# Altium PCB 120W_Syn_Buck_PCB.PcbDoc
Units mm, origin at the board's own origin, x right, y up, seen from the top; angles counter-clockwise.
Board outline 120 x 80 mm, 2 copper layers (Top Layer, Bottom Layer); 58 components, 33 nets, 193 pads, 15 vias.
Unrouted connection lines stored in the file: 73.
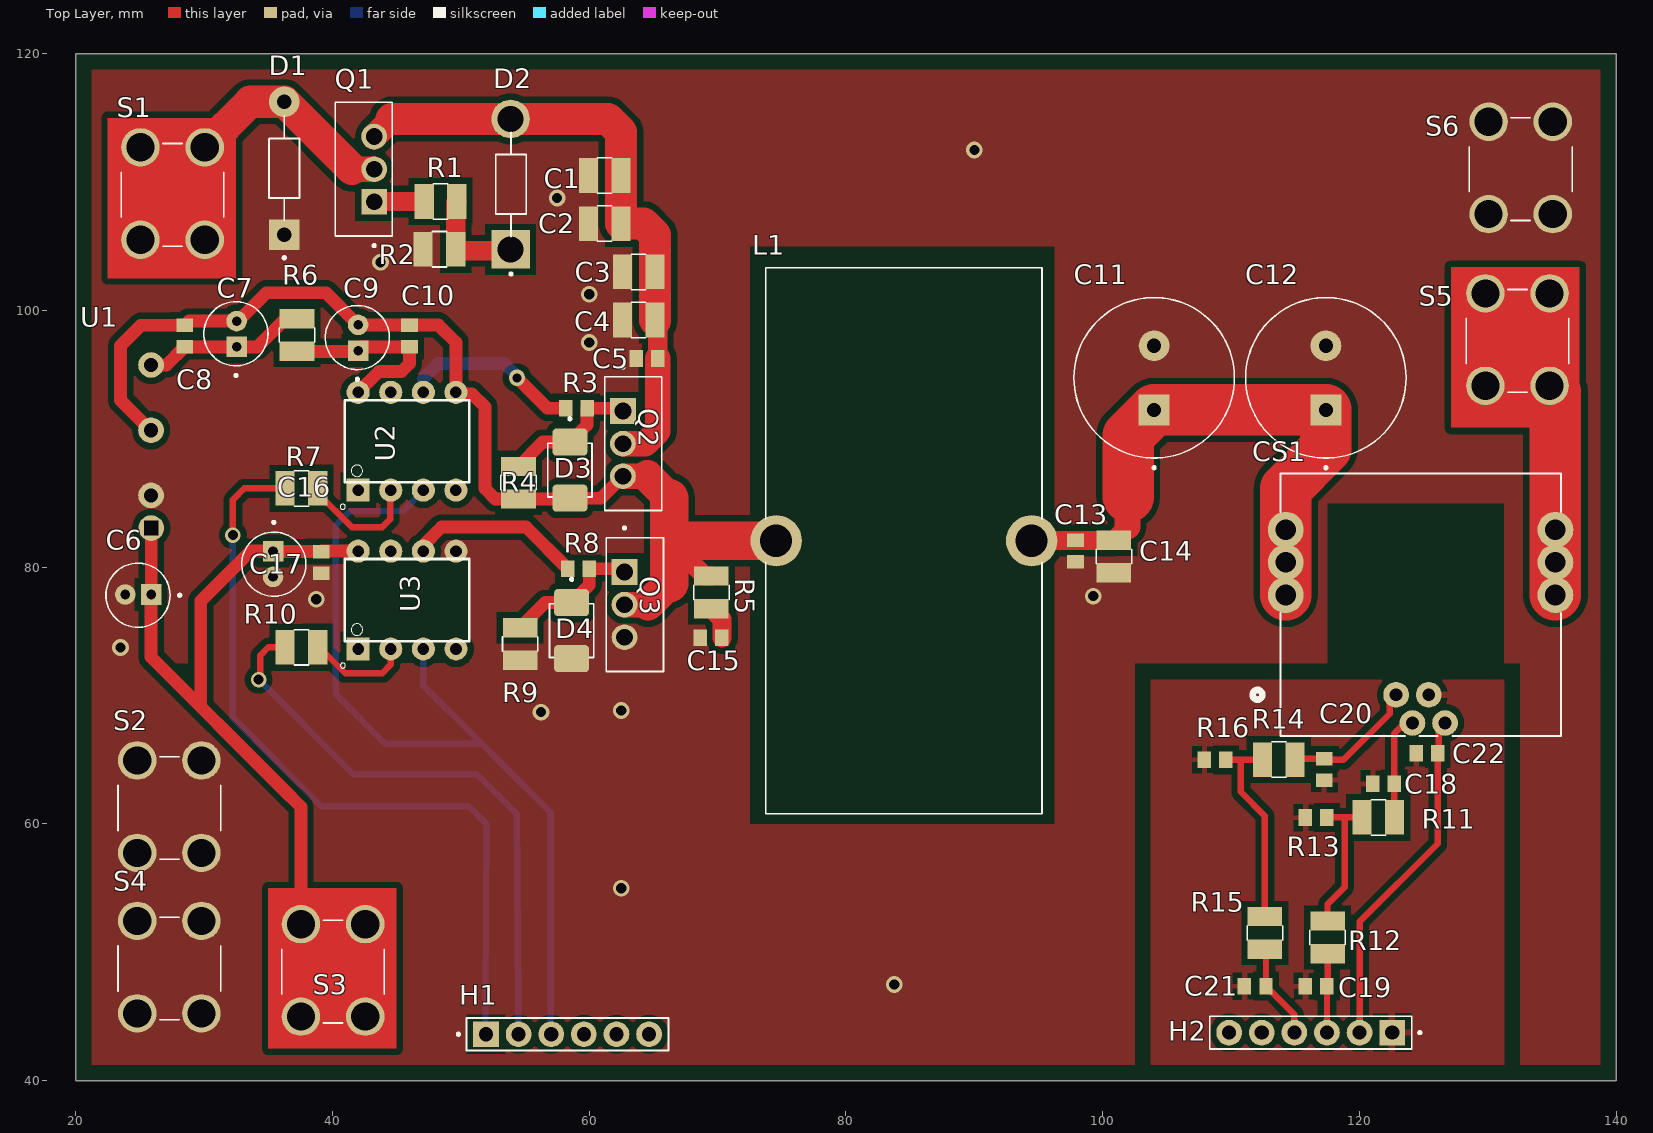
[diagram p0: Top Layer view]
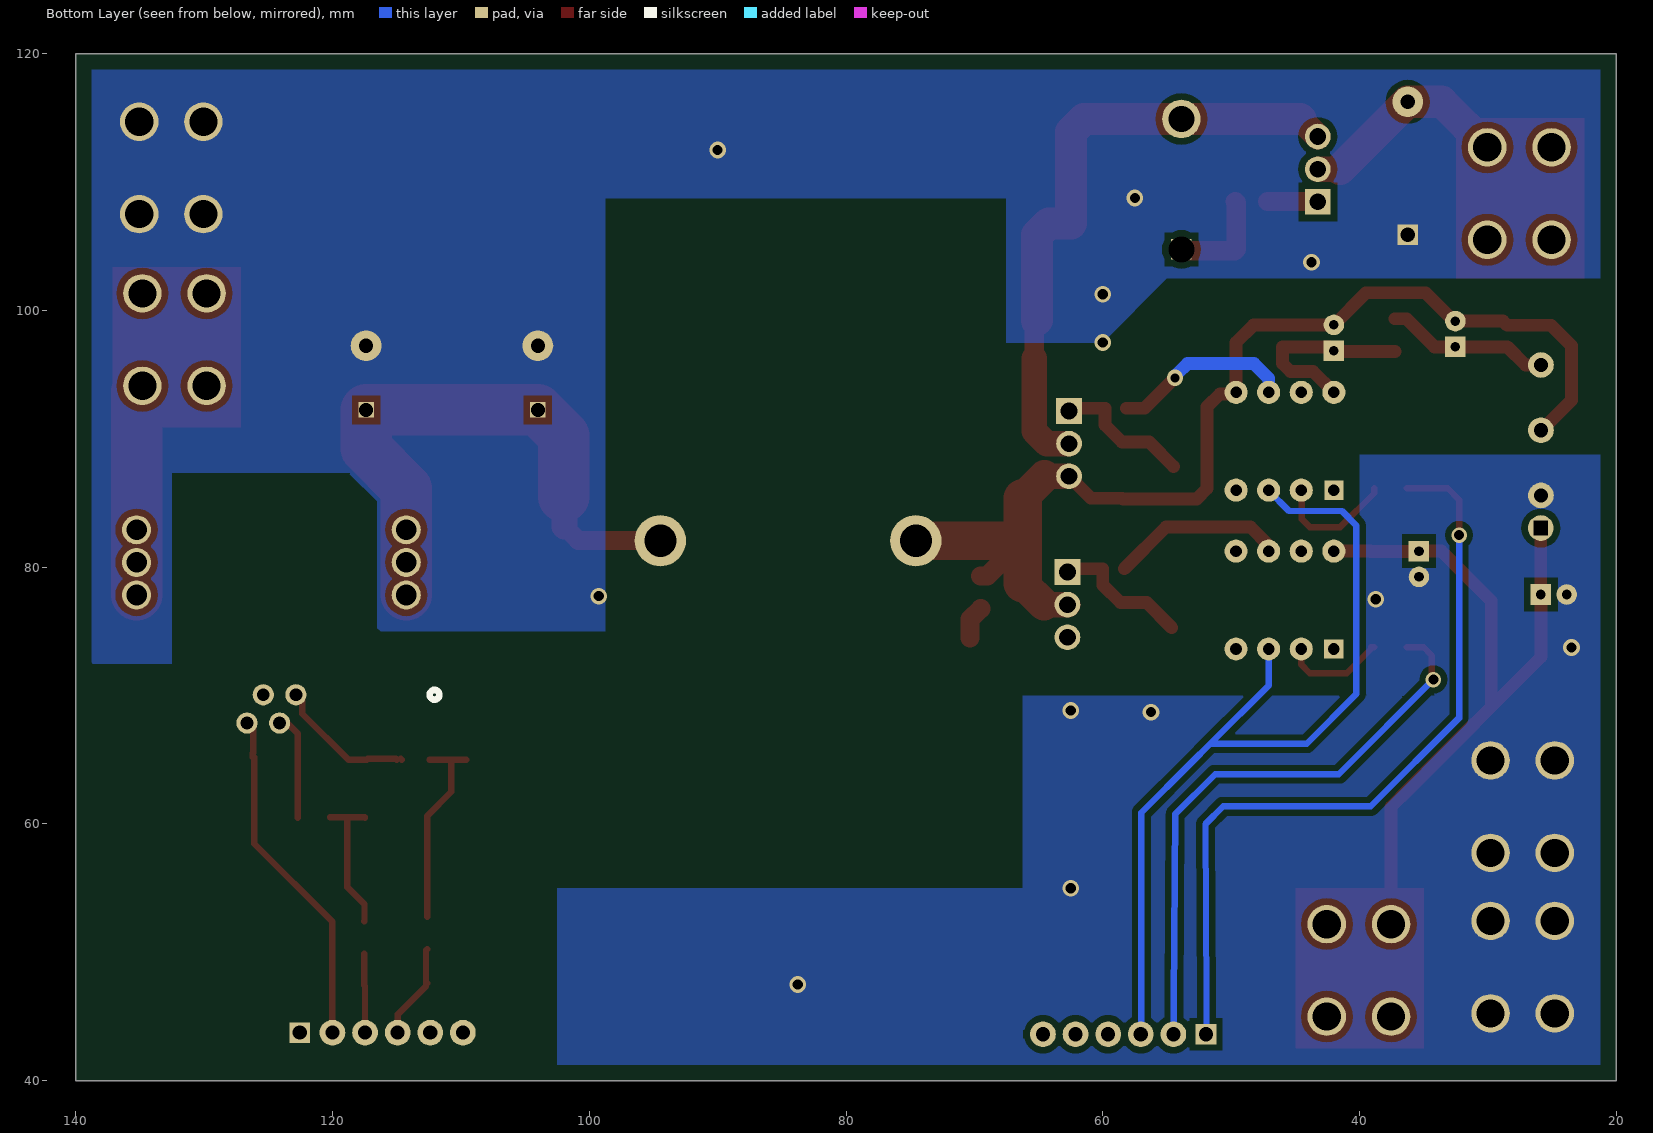
[diagram p1: Bottom Layer view, seen from below]

## Layer stack, top to bottom
Top Solder: solder mask 0.0102, Solder Resist, Dk 3.5
Top Layer: signal copper 0.0356
Dielectric 1: dielectric 0.32, FR-4, Dk 4.8
Bottom Layer: signal copper 0.0356
Bottom Solder: solder mask 0.0102, Solder Resist, Dk 3.5

## Board outline
20,40 140,40 140,120 20,120

## Design rules (kind name [scope] priority, off if disabled: settings)
Clearance Clearance_1 [All] p1: gap=0.5 ignorepadtopadclearanceinfootprint=FALSE
Clearance Clearance_2 [InNet('SGND')] p2: gap=1 ignorepadtopadclearanceinfootprint=FALSE
PlaneClearance [All] p1: clearance=0.5
PolygonConnect PolygonConnect_SGND [InNet('SGND')] p1: thpad.connectstyle=Relief thpad.reliefconductorwidth=0.5 thpad.reliefentries=4 thpad.polygonreliefangle="90 Angle" thpad.airgapwidth=0.5 smdpad.connectstyle=Relief smdpad.reliefconductorwidth=0.4 smdpad.reliefentries=4 smdpad.polygonreliefangle="90 Angle" smdpad.airgapwidth=0.4 via.connectstyle=Relief via.reliefconductorwidth=0.4 via.reliefentries=4 via.polygonreliefangle="90 Angle" via.airgapwidth=0.4
PolygonConnect PolygonConnect_PGND [InNet('PGND')] p2: connectstyle=Direct reliefconductorwidth=0.254 reliefentries=4 polygonreliefangle="90 Angle" airgapwidth=0.254
RoomDefinition 120W_Syn_Buck_Schematic [InComponentClass('120W_Syn_Buck_Schematic')] p1: confinementstyle=ConfineIn formatcopy=TRUE lockcomponents=FALSE outline 178.993,26.924 614.603,26.924 614.603,72.898 178.993,72.898
RoutingVias [InNet('No Net')] p1: holewidth=0.8 width=1.8 viastyle="Through Hole" minholewidth=0.8 minwidth=1.8 maxholewidth=0.8 maxwidth=1.8
SolderMaskExpansion [All] p1: expansion=0.102 istentingtop=FALSE
Width Width_1 [InNet('No Net')] p1: maxlimit=6 minlimit=0.4 preferedwidth=3 minimp=50.000000 maximp=50.000000 favimp=50.000000
29 further rules are at their usual default settings.

## Classes and differential pairs
component class 120W_Syn_Buck_Schematic: C1 C2 C3 C4 C5 C8 C10 C11 C12 C13 C14 C15 C17 C18 C19 C20 C21 C22 CS1 D1 D2 D3 D4 H2 L1 Q1 Q2 Q3 R1 R2 R3 R4 R5 R6 R7 R8 R9 R10 R11 R12 R13 R14 R15 R16 S2 S3 S4 S5 S6 U1 U2 U3

## Components (designator, comment, footprint, x,y, rotation, side; value= is the part's Value field where it differs from the comment)
C1 "1uF" 1210 61.25,110.625 r0 top
C2 "1uF" 1210 61.25,106.875 r0 top
C3 "1uF" 1210 63.897,103.112 r0 top
C4 "1uF" 1210 63.897,99.362 r0 top
C5 "100nF" 0805 64.625,96.25 r0 top
C6 "2.2uF" CAP_ELECTROLYTIC_2MM_5X11MM 28.237,77.697 r180 top
C7 "2.2uF" CAP_ELECTROLYTIC_2MM_5X11MM 32.361,94.802 r90 top
C8 "100nF" 0805 28.5,97.875 r270 top
C9 "22uF" CAP_ELECTROLYTIC_2MM_5X11MM 41.822,94.506 r90 top
C10 "100nF" 0805 46,97.875 r270 top
C11 "470uF" CAP_ELECTROLYTIC_5MM_12.5X25MM 103.473,84.251 r90 top
C12 "470uF" CAP_ELECTROLYTIC_5MM_12.5X25MM 116.848,84.251 r90 top
C13 "100nF" 0805 97.875,81.375 r90 top
C14 "1uF" 1210 100.75,80.875 r90 top
C15 "1nF" 0805 69.625,74.5 r0 top
C16 "22uF" CAP_ELECTROLYTIC_2MM_5X11MM 35.553,83.619 r270 top
C17 "100nF" 0805 39.125,80.5 r90 top
C18 "4.7nF" 0805 122,63.125 r0 top
C19 "1nF" 0805 116.75,47.375 r0 top
C20 "47nF" 0805 117.25,64.375 r90 top
C21 "1nF" 0805 112,47.375 r0 top
C22 "47nF" 0805 125.375,65.5 r0 top
CS1 "Current Sensor" HLSR-10P 111.034,84.543 r0 top (schematic designator S1)
D1 "TVS 58V" TVS_DIODE_DO-15 34.523,106.098 r90 top
D2 "12V ZENER" ZENER_DIODE_DO-201 50.065,100.686 r90 top
D3 "15V ZENER" DO214AA_DIODE 56.9,89.871 r90 top
D4 "15V ZENER" DO214AA_DIODE 57.025,77.371 r90 top
H1 "6 Pin Header" 6_PINS_HEADER_FEMALE 49.674,43.498 r0 top
H2 "6 Pin Header" 6_PINS_HEADER_FEMALE 124.826,43.877 r180 top
L1 "180uH" ATCA-08-251M-V 60.637,104.415 r0 top
Q1 "IRF5210PBF" IRF5210PBF_TO-220 43.202,105.031 r90 top
Q2 "IRF3710PBF" IRF3710PBF_TO-220 62.546,95.848 r270 top
Q3 "IRF3710PBF" IRF3710PBF_TO-220 62.671,83.308 r270 top
R1 "100 ohms" 1210 48.375,108.375 r180 top
R2 "100k ohms" 1210 48.375,104.875 r0 top
R3 "10 ohms" 0805 59.125,92.375 r0 top
R4 "10k ohms" 1210 54.375,86.625 r90 top
R5 "4.7 ohms" 1210 69.625,78 r270 top
R6 "1 ohms" 1210 37.125,98.125 r90 top
R7 "200 ohms" 1210 37.625,86.25 r0 top
R8 "10 ohms" 0805 59.289,79.875 r0 top
R9 "10k ohms" 1210 54.513,74.062 r90 top
R10 "200 ohms" 1210 37.625,73.875 r0 top
R11 "10k ohms" 1210 121.5,60.625 r0 top
R12 "200 ohms" 1210 117.625,51.125 r270 top
R13 "20k ohms" 0805 116.75,60.5 r0 top
R14 "10k ohms" 1210 113.75,65.125 r0 top
R15 "200 ohms" 1210 112.737,51.478 r270 top
R16 "20k ohms" 0805 108.875,65 r0 top
S1 "Screw Terminal" SCREW_TERMINAL_5x7.2MM_2MM 27.5,109 r0 top
S2 "Screw Terminal" SCREW_TERMINAL_5x7.2MM_2MM 27.25,61.25 r0 top
S3 "Screw Terminal" SCREW_TERMINAL_5x7.2MM_2MM 40,48.5 r0 top
S4 "Screw Terminal" SCREW_TERMINAL_5x7.2MM_2MM 27.25,48.75 r0 top
S5 "Screw Terminal" SCREW_TERMINAL_5x7.2MM_2MM 132.25,97.625 r0 top
S6 "Screw Terminal" SCREW_TERMINAL_5x7.2MM_2MM 132.5,111 r0 top
U1 "B1212S-2WR3L" B1212S-2WR3L_SIP-4 25.24,83.05 r90 top
U2 "TLP250H" TLP250H_DIP-8 41.746,84.349 r90 top
U3 "TLP250H" TLP250H_DIP-8 41.751,71.979 r90 top

## Footprints (in the part's own frame and the unit in brackets; to place one, negate y for a bottom-side part, rotate by r counter-clockwise, add the part's x,y. Pads: shape width x height; smd on the part's side, far side on the other; paste and mask are expansions set on the pad)
6_PINS_HEADER_FEMALE [mm]
  rect 2x2 / inner round 1.605 / far side rect 1.605x1.605 hole 1.1: 1(2.286,0.127)
  rect 1.605x1.605 / inner round 1.605 / far side rect 1.605x1.605 hole 1.07: 1(2.286,0.127)
  round 2 hole 1.1: 2(4.826,0.127) 3(7.366,0.127) 4(9.906,0.127) 5(12.446,0.127) 6(14.986,0.127)
  round 1.605 hole 1.07: 2(4.826,0.127) 3(7.366,0.127) 4(9.906,0.127) 5(12.446,0.127) 6(14.986,0.127)
  silkscreen extent 0.04,-1.14 16.51,1.4, body extent 0.76,-1.14 16.51,1.4, height 8.51
0805 [mm]
  rect 1.05x1.3 smd: 1(-0.965,0) 2(0.711,0)
  body extent -1.13,-0.63 0.88,0.63, height 0.94
1210 [mm]
  rect 1.5x2.7 smd: 1(-1.312,-0.112) 2(1.228,-0.112)
  silkscreen extent -0.6,-1.49 0.52,1.27, body extent -1.64,-1.36 1.56,1.14, height 1.5
ATCA-08-251M-V [mm]
  round 4 hole 2.5: 1(13.926,-22.352) 2(33.826,-22.352)
  silkscreen extent 13.13,-43.6 34.63,-1.1, body extent 13.04,-43.8 34.54,-0.9, height 46.85
B1212S-2WR3L_SIP-4 [mm]
  round 2 hole 1.1 square mask+0.102: 1(0,-0.644)
  round 2 hole 1.1 mask+0.102: 2(2.54,-0.635) 4(7.62,-0.635) 6(12.7,-0.635)
  body extent -1.5,-2 17.93,4.98, height 14.1
CAP_ELECTROLYTIC_2MM_5X11MM [mm]
  rect 1.6x1.6 hole 0.75: 1(2.362,-0.178)
  round 1.6 hole 0.75: 2(4.369,-0.178)
  silkscreen extent 0.03,-2.62 5.88,2.38, body extent 0.88,-2.62 5.88,2.38, height 11
CAP_ELECTROLYTIC_5MM_12.5X25MM [mm]
  rect 2.4x2.4 / inner round 1.2 / far side rect 1.2x1.2 hole 1.1: 1(7.999,-0.527)
  round 2.4 hole 1.1: 2(12.999,-0.527)
  silkscreen extent 3.4,-6.78 16.75,5.72, body extent 4.25,-6.77 16.75,5.72, height 25
DO214AA_DIODE [mm]
  rrect25% 2.1x2.7 smd paste+0: 1(-4.496,-1.6)
  rrect25% 2.1x2.7 smd: 2(-0.126,-1.6)
  silkscreen extent -4.41,-3.32 1.79,0.11, body extent -5.03,-3.38 0.41,0.18, height 2.46
HLSR-10P [mm]
  round 2 / inner round 1.524 / far side round 1.651 hole 1 paste-0.826 mask+0: 1(11.811,-14.478) 2(13.081,-16.678) 3(14.351,-14.478) 4(15.621,-16.678)
  round 2.8 / inner round 1.524 / far side round 2.261 hole 1.6 paste-1.13 mask-1.13: 5(24.216,-6.708) 6(24.216,-4.168) 7(24.216,-1.628) 8(3.216,-1.628) 9(3.216,-4.168) 10(3.216,-6.708)
  silkscreen extent 0.64,-17.69 24.64,2.76, body extent 2.29,-17.78 25.15,0.76, height 12
IRF3710PBF_TO-220 [mm]
  rect 2x2 hole 1.3: 1(3.683,0.079)
  round 2 hole 1.3: 2(6.223,0.079) 3(8.763,0.079)
  silkscreen extent 0.17,-1.33 11.43,3.11, body extent 1.02,-1.4 11.43,3.05, height 19.3
IRF5210PBF_TO-220 [mm]
  rect 2x2 hole 1.3: 1(3.429,-0.048)
  round 2 hole 1.3: 2(5.969,-0.048) 3(8.509,-0.048)
  silkscreen extent -0.09,-1.46 11.18,2.98, body extent 0.76,-1.52 11.18,2.92, height 19.3
SCREW_TERMINAL_5x7.2MM_2MM [mm]
  round 3 hole 2.2: 1(-2.45,-3.5) 1(-2.45,3.7) 1(2.55,-3.5) 1(2.55,3.7)
  silkscreen extent -3.95,-4 4.05,4, body extent -4.55,-3.51 4.59,4.36, height 17.34
TLP250H_DIP-8 [mm]
  rect 1.5x1.5 / inner round 1.5 / far side rect 1.5x1.5 hole 0.9: 1(1.651,-0.254)
  rect 1.8x1.8 / inner round 1.5 / far side rect 1.5x1.5 hole 0.9: 1(1.651,-0.254)
  round 1.5 hole 0.9: 2(1.651,-2.794) 3(1.651,-5.334) 4(1.651,-7.874) 5(9.271,-7.874) 6(9.271,-5.334) 7(9.271,-2.794) 8(9.271,-0.254)
  round 1.8 hole 0.9: 2(1.651,-2.794) 3(1.651,-5.334) 4(1.651,-7.874) 5(9.271,-7.874) 6(9.271,-5.334) 7(9.271,-2.794) 8(9.271,-0.254)
  silkscreen extent 0.16,-8.91 8.66,1.14, body extent 1.44,-9.15 9.48,1.03, height 4.51
TVS_DIODE_DO-15 [mm]
  rect 2.4x2.4 / inner round 1.59 / far side rect 1.59x1.59 hole 1.1 mask+0.102: 1(-0.208,-1.727)
  rect 1.59x1.59 / inner round 1.59 / far side rect 1.59x1.59 hole 1.06 mask+0.102: 1(-0.202,-1.739)
  round 2.4 hole 1.1 mask+0.102: 2(10.152,-1.727)
  round 1.59 hole 1.06 mask+0.102: 2(10.158,-1.739)
  silkscreen extent -2.1,-2.93 9.04,-0.54, body extent -0.73,-3.09 10.41,-0.37, height 2.72
ZENER_DIODE_DO-201 [mm]
  rect 1.59x1.59 / inner round 1.59 / far side rect 1.59x1.59 hole 1.06 mask+0.102: 1(4.064,-3.81)
  rect 3x3 / inner round 1.59 / far side rect 1.59x1.59 hole 2 mask+0.102: 1(4.064,-3.81)
  round 1.59 hole 1.06 mask+0.102: 2(14.224,-3.81)
  round 3 hole 2 mask+0.102: 2(14.224,-3.81)
  silkscreen extent 2.06,-5.03 13.2,-2.66, body extent 3.54,-5.23 14.68,-2.51, height 2.72

## Part data
C1 C2 C3 C4 C14: library part HMK325B7105KN-T, "1uF  MLCC (3225) 1210 1uF 100V 10% X7R"
C5 C8 C10 C13 C17: library part AC0805KKX7R0BB104, "100nF  MLCC (2012) 0805 100nF 100VDC ±10% X7R AUTOMOTIVE"
C6 C7: library part PKRI-050V2R2MC110-T/A5.0, "2.2uF Electrolytic Capacitor"
C9 C16: library part PKRM-050V220MC110-T/A5.0, "22uF Electrolytic Capacitor"
C11 C12: library part EEUFC1H471, "470uF Electrolytic Capacitor"
C15: library part CL21B102KC6WPNC, "1nF Snubber  MLCC (2012) 0805 1nF 100VDC ±10% X7R AUTOMOTIVE"
C18: library part CL21C472JBFNNNE, "4.7nF MLCC (2012) 0805 4.7nF 50VDC ±5%  0G (NP0)"
C19 C21: library part CC0805JRNPO9BN1021, "1nF  MLCC (2012) 0805 1nF 50VDC ±5% C0G (NP0)"
C20 C22: library part CC0805JRX7R9BB473, "47nF MLCC (2012) 0805 47nF 50VDC ±5% X7R"
CS1: library part HLSR-10P, "10A Hall effect, open loop, +-20A, isolated"
D1: library part P6KE68A-TKS, "TVS Diode 58.1V 600W"
D2: library part 1N5349B, "12V Zener Diode 5W"
D3 D4: library part 1SMB5929BT3G, "15V ZENER DIODE 3W"
H1: library part DS1023-1X6S21
H2: library part DS1023-1X6S21, "6x1 FEMALE HEADER"
L1: library part INDUCTOR_LAB-MADE, "180uH Inductor 8A"
Q1: "P-Channel Power MOSFET, TO-220AB, -100V, -40A,"
Q2 Q3: "N-Channel Power MOSFET, TO-220AB, 100V, 57A"
R1: library part "Resistor 100 ohms"
R2: library part "Resistor 100k ohms"
R3 R8: library part "Resistor 10 ohms"
R4 R9 R11 R14: library part "Resistor 10k ohms"
R5: library part "Resistor 4.7 ohms"
R6: library part "Resistor 1 ohm"
R7 R10 R12 R15: library part "Resistor 200 ohms"
R13 R16: library part "Resistor 20k ohms"
S1 S2 S3 S4 S5 S6: library part K14-00AH, "1 Pin Screw Terminal"
U1: "12V-12V isolated DC-DC, 2W, Hi-Link, SIP-6, Pins 3,5 NC"
U2 U3: "LED Optocoupler, VCC-GND 100nF bypass"

## Via types
v1: diameter 1.3, hole 0.8, Top Layer to Bottom Layer, 12 vias
v2: diameter 1.2, hole 0.8, Top Layer to Bottom Layer, 2 vias
v3: diameter 1.27, hole 0.711, Top Layer to Bottom Layer, 1 vias

## Nets (pads, with @x,y where several pads share a name; then routed paths per layer and width w, separated by ;. In a path a pad name is that pad's centre, name@x,y a point inside that pad or via, vN(x,y) a via of type N, cw(c..) or ccw(c..) an arc to the next point about the centre after c; other vN are vias at no path point)
5V_SENSOR: C22.2 CS1.4 H2.2
12V_ISO: C7.1 C8.2 R6.2 U1.6
12V_RAW: C6.1 C16.1 C17.2 S3.1 U1.1 U3.8
48V_PROT: C1.2 C2.2 C3.2 C4.2 C5.2 D2.2 Q1.3 Q2.2
48V_RAW: D1.2 Q1.2 S1.1
EN/DIS_GPIO: H1.4
FAULT: H1.5
HLSR_Vout: H2.3 R12.2
HLSR_Vout_PIN: C18.2 CS1.2 R11.2
HLSR_Vref: C21.2 H2.4 R15.2
HLSR_Vref_PIN: C20.2 CS1.1 R14.2
HS_GND: C7.2 C8.1 C9.2 C10.1 D3.1 L1.1 Q2.3 Q3.2 R4.1 R5.1 U1.4 U2.5
HS_MOSFET_IN: R3.1 U2.6
LS_MOSFET_IN: R8.1 U3.6
NetC9_1: C9.1 C10.2 R6.1 U2.8
NetC15_2: C15.2 R5.2
NetD2_1: D2.1 R1.1 R2.2
NetD3_2: D3.2 Q2.1 R3.2 R4.2
NetD4_2: D4.2 Q3.1 R8.2 R9.2
NetQ1_1: Q1.1 R1.2
NetR7_2: R7.2 U2.2
NetR10_2: R10.2 U3.2
NetR11_1: R11.1 R12.1 R13.2
NetR14_1: R14.1 R15.1 R16.2
PGND: C1.1 C2.1 C3.1 C4.1 C5.1 C6.2 C11.2 C12.2 C13.1 C14.1 C15.1 C16.2 C17.1 D1.1 D4.1 Q3.3 R2.1 R9.1 S2.1 S4.1 S6.1 U1.2 U3.5
  other v1: 83.75,47.5 62.5,55 56.25,68.715 62.5,68.84 23.5,73.75 38.75,77.5 99.25,77.75 60,97.5 60,101.25 43.75,103.75 57.5,108.75 90,112.5
SGND: C18.1 C19.1 C20.1 C21.1 C22.1 CS1.3 H1.3 H2.1 R13.1 R16.1 U2.3 U3.3 | length 31.4
  Bottom Layer w0.5: 44.125,66.25 51.625,66.25 53.122,64.752 57,60.875 ; H1.3@57,43.665 57,46.25 57,60
SPARE_ADC_1: H2.5
SPARE_ADC_2: H2.6
SPARE_CONTROL: H1.6
STM32_HS: H1.1 R7.1 | length 15.7
  Bottom Layer w0.5: 50.625,61.375 52,60 51.92,46.25
STM32_LS: H1.2 R10.1 | length 21.5
  Bottom Layer w0.5: 51.246,63.875 54.37,60.751 54.46,46.25 H1.2@54.46,43.665
Vout_OUT: CS1.5 CS1.6 CS1.7 S5.1
Vout_SENSOR_IN: C11.1 C12.1 C13.2 C14.2 CS1.8 CS1.9 CS1.10 L1.2
pads on no net: C19.2 U2.1 U2.4 U2.7 U3.1 U3.4 U3.7
copper on no net: | length 579.2
  Top Layer w0.5: v2(32.25,82.5) 32.25,85.25 33.138,86.138 36.313,86.138 ; v2(34.25,71.25) 34.375,71.375 34.375,73.125 35.013,73.763 36.313,73.763 ; 38.853,73.763 39.112,73.763 ; 38.853,86.138 38.853,85.772 41.5,83.125 43.75,83.125 43.875,83.125 44.5,83.75 44.5,85.96 44.54,86 ; 38.983,73.763 40.995,71.75 43.875,71.75 44.545,72.42 44.545,73.63 44.38,73.63 ; 109.586,65 109.599,65.013 112.438,65.013 ; 110.75,65 110.75,62.5 112.625,60.625 112.625,52.79 ; 112.625,47.586 112.711,47.5 ; 112.625,50.25 112.711,50.164 112.711,47.375 114.92,45.166 114.92,43.75 ; 114.603,65.013 114.676,65.086 ; 114.978,65.013 115.051,65.086 117.25,65.086 117.336,65 118.75,65 122.345,68.595 122.345,70.15 ; 117.46,43.75 117.461,43.751 117.461,47.375 117.513,47.427 117.513,49.897 ; 117.461,60.5 117.474,60.513 120.188,60.513 ; 117.513,52.437 117.5,52.45 117.5,53.75 118.831,55.081 118.831,60.513 ; 120,43.75 120,52.375 126.086,58.461 126.086,64.211 126.086,65.211 ; 122.711,60.496 122.711,63.125 122.711,67.046 123.615,67.95 ; 126.155,67.95 126.155,65.556 126.211,65.5 126.211,65.211 ; 134.675,83.075 134.75,83 134.8,83.05
  Top Layer w1: 25.875,90.67 25.83,90.67 23.5,93 23.5,97.25 25,98.75 25.09,98.84 28.5,98.84 28.83,99.17 32.539,99.17 32.67,99.17 34.875,101.375 39.5,101.375 42,98.875 44.625,98.875 45.965,98.875 ; 25.875,95.75 27.086,95.75 28.5,97.164 32.539,97.164 34.164,97.164 36.353,99.353 37.237,99.353 ; 25.884,83.05 25.884,77.884 25.875,77.875 25.875,73 36.125,62.75 37.55,61.325 37.55,52.2 ; 29.75,69.25 29.75,77.375 33.625,81.25 35.375,81.25 35.414,81.211 39.125,81.211 39.164,81.25 42.005,81.25 ; 37.237,96.813 41.945,96.813 42,96.868 42.295,97.164 46,97.164 ; 40,52.75 40.05,52.7 ; 42,93.62 43.63,95.25 45.375,95.25 46,95.875 46,97.164 ; 45.879,97.164 46,97.164 ; 46,98.84 45.965,98.875 ; 47.085,81.25 47.085,81.71 48.5,83.125 55.074,83.125 58.324,79.875 ; v3(54.375,94.75) 56.75,92.375 58.16,92.375 ; 54.487,87.853 56.379,89.745 58.5,89.745 59.836,91.081 59.836,92.375 62.415,92.375 62.625,92.165 ; 54.625,75.29 56.58,77.245 58.625,77.245 60,78.62 60,79.875 62.5,79.875 62.75,79.625 ; 62.625,87.085 60.915,85.375 58.5,85.375 58.438,85.313 54.487,85.313 52.687,85.313 51.875,86.125 51.875,92.5 50.875,93.5 49.74,93.5 49.62,93.62 49.62,97.495 49.625,97.5 48.25,98.875 45.965,98.875
  Top Layer w1.5: 43.25,108.46 43.277,108.487 47.147,108.487 ; 49.687,108.487 49.603,108.403 49.603,104.763 49.722,104.644 53.912,104.644 ; 65.336,96.25 65.336,99.039 ; 66.25,82.063 69,79.312 69.513,79.312 ; 69.513,76.772 70.336,75.949 70.336,74.5 ; 94.463,82.063 94.486,82.086 97.875,82.086 100.845,82.086 100.862,82.103 101.979,83.22 ; 101.923,85.423 101.979,85.479 ; 134.8,94.125 135.25,93.675
  Top Layer w2: 41.518,111 43.25,111 ; 43.25,113.54 44.62,114.91 ; 62.625,87.085 64.54,87.085 ; 62.625,89.625 64.375,89.625 65.25,90.5 65.336,90.586 65.336,92.336 65.336,96.25 ; 62.75,77.085 64.585,77.085 ; 65.125,99.25 65.336,99.039 ; 101.923,83.164 101.923,85.423
  Top Layer w2.5: 30.05,112.7 33.6,116.25 36.25,116.25 ; 36.262,116.256 41.518,111 ; 44.62,114.91 53.875,114.91 61.465,114.91 61.5,114.875 62.478,113.897 62.478,110.513 62.478,106.763 64.237,106.763 64.375,106.625 65.125,105.875 65.125,103 65.125,99.25 ; 64.54,87.085 66.25,85.375 ; 64.585,77.085 66.25,78.75
  Top Layer w3: 66.25,78.75 66.25,85.375 ; 66.25,82.063 72.438,82.063 74.563,82.063
  Top Layer w4: 101.979,85.479 101.979,90.229 101.987,90.237 104,92.25 117.375,92.25 117.375,89.25 114.25,86.125 114.25,82.915 114.25,77.835 ; 135.25,77.835 135.25,82.915 135.25,93.675
  Bottom Layer w0.5: v2(32.25,82.5) 32.25,68.25 39.125,61.375 50.625,61.375 50.613,61.375 ; v2(34.25,71.25) 41.625,63.875 51.246,63.875 ; 44.125,66.25 40.25,70.125 40.25,83.25 41.375,84.375 45.5,84.375 47.08,85.955 47.08,86 ; 47.085,73.63 47.085,70.79 51.625,66.25 ; 51.92,46.25 51.92,43.665 51.96,43.625 ; 54.46,43.665 54.5,43.625 ; 57,43.665 57.04,43.625 ; 57,60 57,60.875
  Bottom Layer w1: 47.08,93.62 47.08,94.705 48.25,95.875 ; 48.235,95.86 53.39,95.86 v3@54.25,95

## Polygon pours and split planes (outlines as drawn)
PGND on Top Layer "NONET_L-01_P-001" (solid, pour order 9): 132.5,72.5 132.5,41.25 138.75,41.25 138.75,72.508
PGND on Top Layer "NONET_L-01_P-001" (solid, pour order 8): 102.5,72.5 102.5,41.25 21.25,41.25 21.25,72.508 102.492,72.508
PGND on Top Layer "NONET_L-01_P-001" (solid, pour order 1): 21.25,118.75 21.25,72.508 138.75,72.508 138.75,118.75
SGND on Top Layer "NONET_L-01_P-001" (solid, pour order 0): 103.75,71.25 103.75,41.25 131.25,41.25 131.25,71.125 131.375,71.25
PGND on Bottom Layer "NONET_L-01_P-001" (solid, pour order 15): 118.75,87.375 116.5,85.125 116.5,75.25 116.25,75 98.75,75 98.75,87.375
PGND on Bottom Layer "NONET_L-01_P-001" (solid, pour order 12): 132.5,72.5 138.652,72.5 138.75,72.598 138.75,87.75 132.5,87.75
PGND on Bottom Layer "NONET_L-01_P-001" (solid, pour order 7): 67.5,118.75 138.75,118.75 138.75,87.375 98.75,87.375 98.75,108.75 67.5,108.75
PGND on Bottom Layer "NONET_L-01_P-001" (solid, pour order 6): 66.25,41.25 102.5,41.25 102.5,55 66.25,55
PGND on Bottom Layer "NONET_L-01_P-001" (solid, pour order 5): 21.25,70 21.25,88.75 40,88.75 40,83.75 40,74.875 40,70
PGND on Bottom Layer "NONET_L-01_P-001" (solid, pour order 4): 66.25,70 66.25,41.25 21.25,41.25 21.25,70
PGND on Bottom Layer "NONET_L-01_P-001" (solid, pour order 3): 21.25,118.75 21.25,102.5 55,102.5 60,97.5 67.5,97.5 67.5,118.75

## Other copper
Top Layer:
  rectangle net Vout_OUT: 127.125,90.875 137.125,103.375
  rectangle net 12V_RAW: 35,42.5 45,55
  rectangle net 48V_RAW: 22.5,102.5 32.5,115
  pour cut-out: 117.5,85 117.5,72.5 131.25,72.5 131.25,85
  pour cut-out: 72.5,105 72.5,60 96.25,60 96.25,105
  pour cut-out: 40.965,80.64 40.965,74.24 50.665,74.24 50.665,80.64
  pour cut-out: 40.96,93.01 40.96,86.61 50.66,86.61 50.66,93.01
  pour cut-out: 73.763,103.313 73.763,60.812 95.262,60.812 95.262,103.313

## Text inside footprints (layer, text, board x,y; h text height)
L1: Mechanical 1 "BOBİN" at 78.417,86.635 h2.54